# Altium PCB P-S 0-30V 3A Line.PcbDoc
Units mm, origin at the board's own origin, x right, y up, seen from the top; angles counter-clockwise.
Board outline 200 x 100 mm, 2 copper layers (Top Layer, Bottom Layer); 33 components, 16 nets, 76 pads, 0 vias.
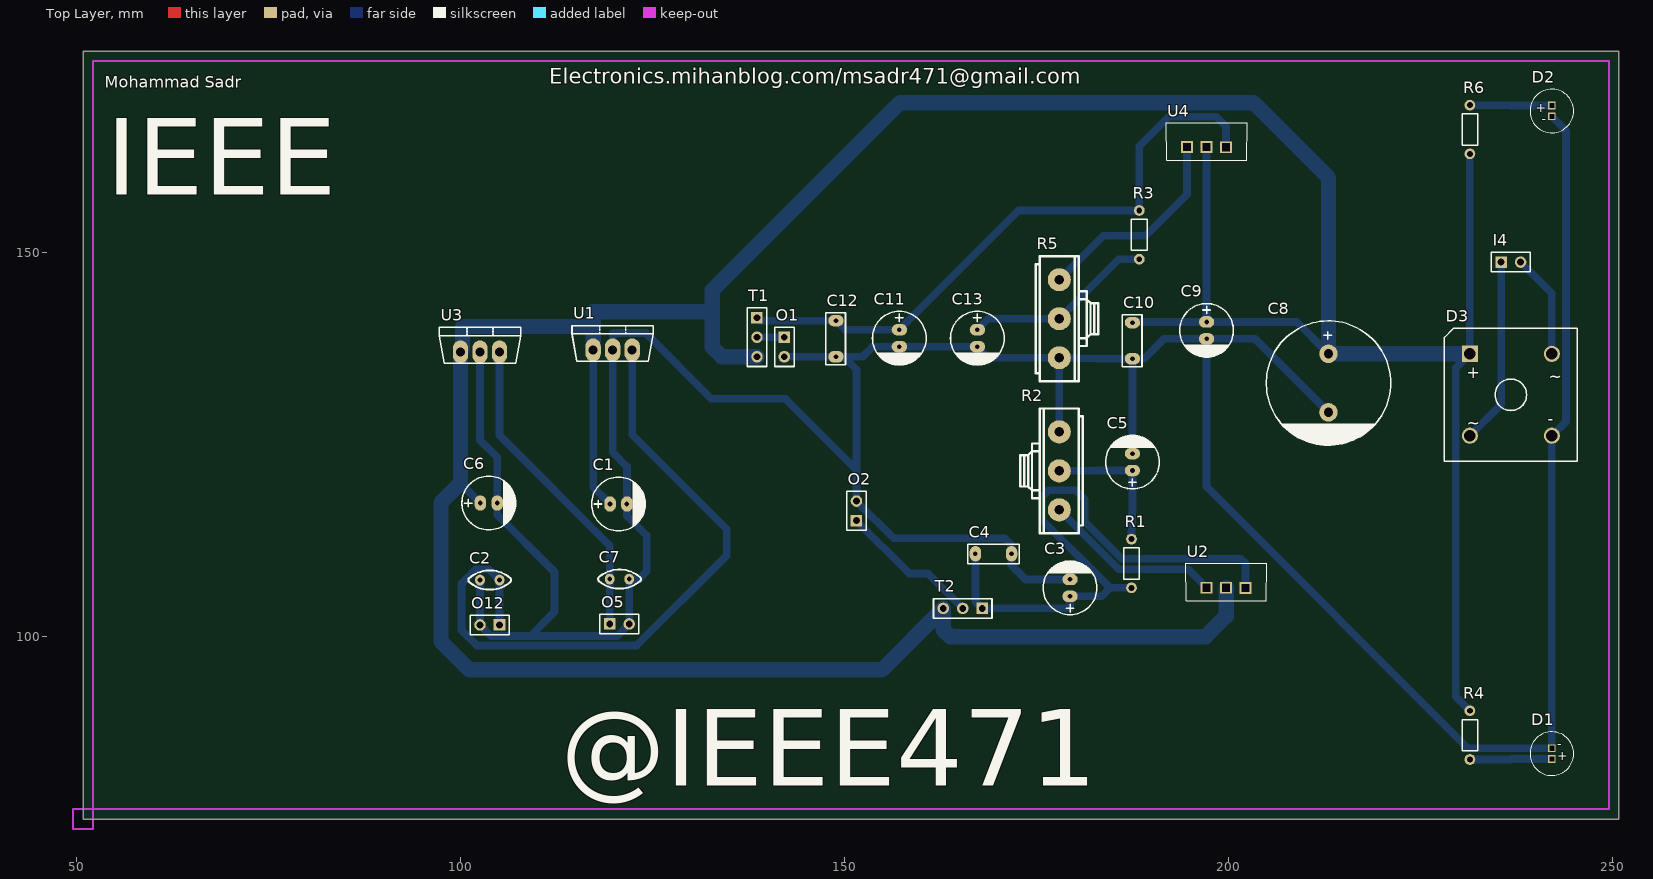
[diagram p0: Top Layer view]
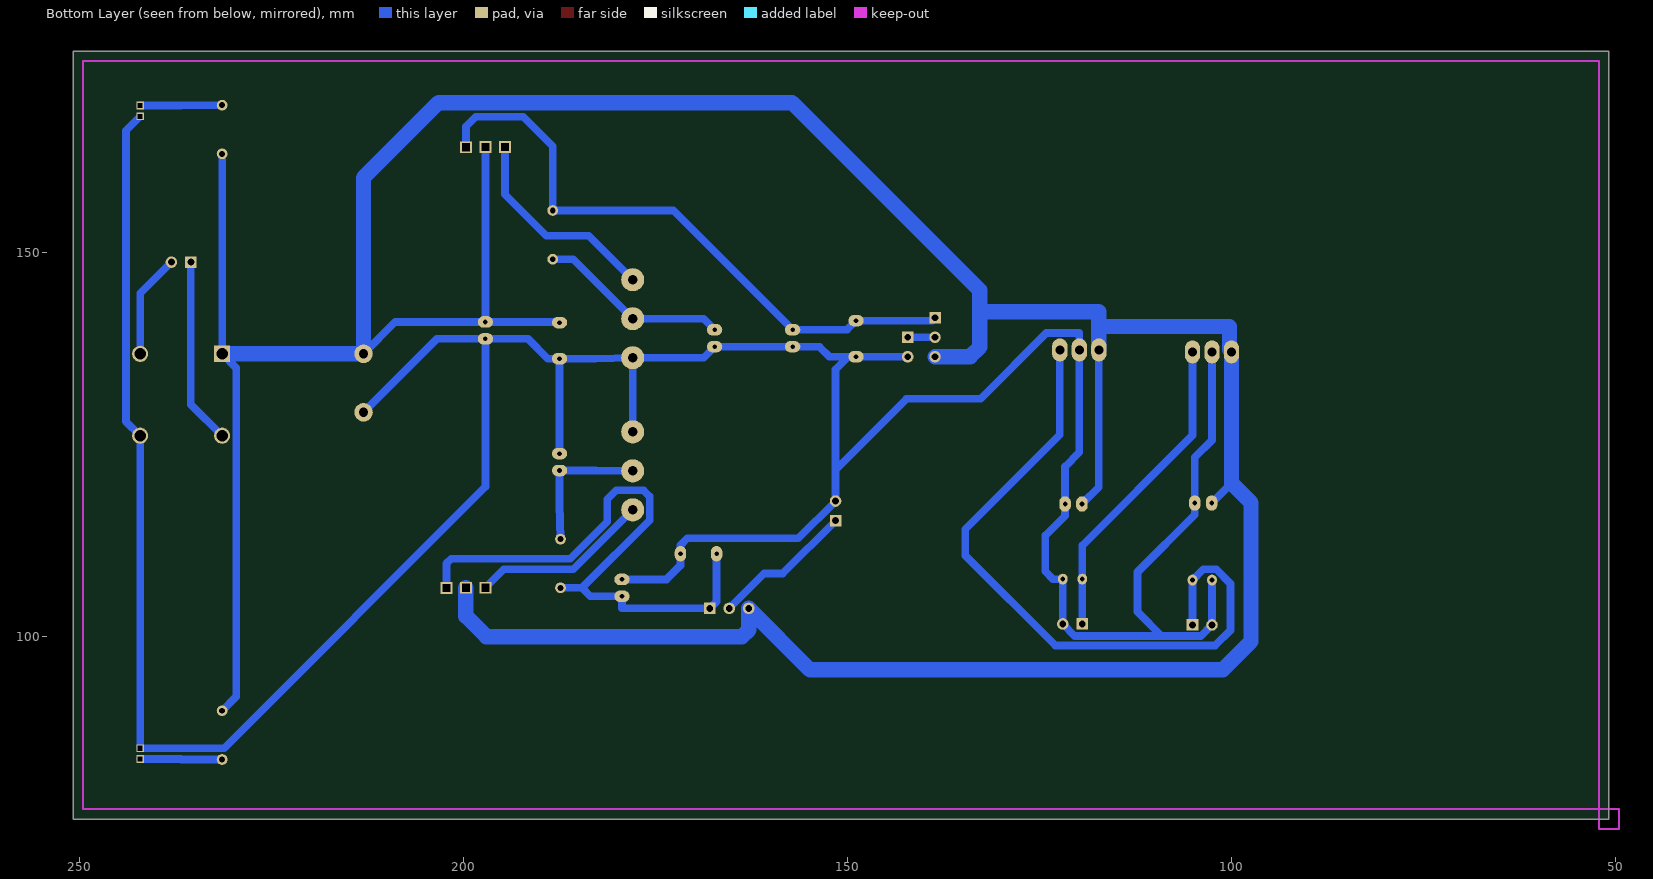
[diagram p1: Bottom Layer view, seen from below]

## Layer stack, top to bottom
Top Solder: solder mask 0.0102, Solder Resist, Dk 3.5
Top Layer: signal copper 0.0356
Dielectric 1: dielectric 0.32, FR-4, Dk 4.8
Bottom Layer: signal copper 0.0356
Bottom Solder: solder mask 0.0102, Solder Resist, Dk 3.5

## Board outline
50.8,76.2 250.8,76.2 250.8,176.2 50.8,176.2

## Design rules (kind name [scope] priority, off if disabled: settings)
Clearance [All] p1: gap=0.2
PolygonConnect [All] p1: connectstyle=Relief reliefconductorwidth=0.254 reliefentries=4 polygonreliefangle="90 Angle" airgapwidth=0.254
RoomDefinition "P-S 0-30V 3A Line" [InComponentClass('P-S 0-30V 3A Line')] p1: confinementstyle=ConfineIn formatcopy=TRUE lockcomponents=FALSE outline 52.1,77.5 249.5,77.5 249.5,174.9 52.1,174.9
RoutingVias [All] p1: holewidth=0.6 width=1 viastyle="Through Hole" minholewidth=0.711 minwidth=1.27 maxholewidth=0.711 maxwidth=1.27
SolderMaskExpansion [All] p1: expansion=0.102
Width [All] p1: maxlimit=1 minlimit=1 preferedwidth=1 minimp=50.000000 maximp=50.000000 favimp=50.000000
30 further rules are at their usual default settings.

## Components (designator, comment, footprint, x,y, rotation, side; value= is the part's Value field where it differs from the comment)
C1 "1uF" "cap 02" 120.523,117.221 r180 top
C2 "100nF" "Cap - 100nF" 103.759,107.315 r180 top
C3 "1uF" "cap 02" 179.324,106.299 r270 top
C4 "100nF" "Cap - 100nF - 2" 167.005,110.744 r0 top
C5 "1uF" "cap 02" 187.452,122.682 r270 top
C6 "1uF" "cap 02" 103.632,117.348 r180 top
C7 "100nF" "Cap - 100nF" 120.65,107.442 r0 top
C8 "1uF" "CAP 05" 212.979,132.969 r90 top
C9 "1uF" "cap 02" 197.104,139.827 r90 top
C10 "100nF" "Cap - 100nF - 2" 187.452,140.843 r270 top
C11 "1uF" "cap 02" 157.099,138.811 r90 top
C12 "100nF" "Cap - 100nF - 2" 148.844,141.097 r270 top
C13 "1uF" "cap 02" 167.259,138.811 r90 top
D1 "LED" "Blue LED 5mm" 242.062,84.709 r0 top
D2 "LED" "Blue LED 5mm" 242.062,168.402 r180 top
D3 "Bridge2" D-46_6A 236.728,131.445 r0 top
I4 "Header 2" HDR1X2 235.458,148.717 r0 top
O1 "Header 2" HDR1X2 142.113,138.938 r270 top
O2 "Header 2" HDR1X2 151.511,115.062 r90 top
O5 "Header 2" HDR1X2 119.38,101.6 r0 top
O12 "Header 2" HDR1X2 105.029,101.473 r180 top
R1 "1K" Res-(1/4) 187.325,109.474 r270 top
R2 "POT" VOL_1 177.927,116.459 r90 top
R3 "1K" Res-(1/4) 188.341,152.273 r90 top
R4 "1K" Res-(1/4) 231.394,87.122 r90 top
R5 "POT" VOL_1 177.927,146.431 r270 top
R6 "1K" Res-(1/4) 231.394,165.989 r270 top
T1 "2N3055" HDR1X3 138.557,141.478 r270 top
T2 "2N3055" HDR1X3 167.894,103.632 r180 top
U1 "MC7812T" TO220V 119.761,137.287 r0 top
U2 "Volt Reg" TO220 199.644,106.299 r0 top
U3 "MC7805T" TO220V 102.489,137.033 r0 top
U4 "Volt Reg" TO220 197.104,163.703 r0 top

## Footprints (in the part's own frame and the unit in brackets; to place one, negate y for a bottom-side part, rotate by r counter-clockwise, add the part's x,y. Pads: shape width x height; smd on the part's side, far side on the other; paste and mask are expansions set on the pad)
"Blue LED 5mm" [mm] "Blue LED 5mm"
  rect 1x1 hole 0.6 square: 1(0,-0.703) 2(0,0.703)
  silkscreen extent -2.84,-2.84 2.84,2.84, body extent -2.9,-2.9 2.9,2.9, height 13.5
"cap 02" [mm]
  oval 1.5x2 hole 0.6: 1(1.1,0) 2(-1.1,0)
  silkscreen extent -3.5,-3.5 3.5,3.5
"CAP 05" [mil]
  round 95 hole 48: 1(150,0) 2(-150,0)
  silkscreen extent -319,-319 319,319, body extent -320,-320 320,320, height 651
"Cap - 100nF" [mil]
  oval 50x55 hole 25: 1(-50,0) 2(50,0)
  silkscreen extent -110,-49 110,49, body extent -115,-34 115,33, height 272
"Cap - 100nF - 2" [mm]
  oval 1.5x2 hole 0.6: 1(0,0) 2(4.7,0)
  silkscreen extent -1.02,-1.33 5.72,1.24, body extent -0.75,-1.2 5.55,1.2, height 6.84
D-46_6A [mm] "Bridge Rectifier; 4 Terminals; Body 16.8 x 16.8 mm (typ); Pitch 10.67 mm"
  rect 2.1x2.1 hole 1.5: 1(-5.335,5.335)
  round 2.1 hole 1.5: 2(-5.335,-5.335) 3(5.335,-5.335) 4(5.335,5.335)
  silkscreen extent -8.65,-8.65 8.65,8.65, body extent -8.65,-8.65 8.65,8.65, height 6.35
HDR1X2 [mm] "Connector; Header; 2 Position"
  rect 1.5x1.5 hole 0.9: 1(0,0)
  round 1.5 hole 0.9: 2(2.54,0)
  silkscreen extent -1.27,-1.27 3.81,1.27
HDR1X3 [mm] "Connector; Header; 3 Position"
  rect 1.5x1.5 hole 0.9: 1(0,0)
  round 1.5 hole 0.9: 2(2.54,0) 3(5.08,0)
  silkscreen extent -1.27,-1.27 6.35,1.27
Res-(1/4) [mil]
  round 55 hole 30: 1(-125,0) 2(125,0)
  silkscreen extent -80,-40 80,40, body extent -135,-36 135,36, height 115
TO220 [mil] "TO220"
  rect 60x60 hole 40 square: 1(-100,0) 2(0,0) 3(100,-1)
  silkscreen extent -210,-67 209,125, body extent -210,-65 210,125, height 890
TO220V [mm]
  oval 2x3 hole 1.2: 1(-2.54,0) 2(0,0) 3(2.54,0)
  silkscreen extent -5.29,-1.48 5.29,3.17
VOL_1 [mm]
  round 3 hole 1.2: 1(0,0) 2(5.08,0) 3(10.16,0)
  silkscreen extent -3.05,-3.05 13.21,5.08

## Part data
C1 C3 C5 C6 C8 C9 C11 C13: library part Cap-Polar, "Polar Capacitor"
C2 C4 C7 C10 C12: library part Cap-Bipolar, "Bipolar Capacitor"
D1 D2: library part "LED Full color"
D3: "Diode Bridge"
I4 O1 O2 O5 O12: "Header, 2-Pin"
R1 R3 R4 R6: library part Resistor, "Resistor"
T1 T2: library part "Header 3", "Header, 3-Pin"
U2 U4: library part "Volt reg 3", "LM337"

## Nets (pads, with @x,y where several pads share a name; then routed paths per layer and width w, separated by ;. In a path a pad name is that pad's centre, name@x,y a point inside that pad or via, vN(x,y) a via of type N, cw(c..) or ccw(c..) an arc to the next point about the centre after c; other vN are vias at no path point)
GND: C1.2 C2.2 C3.2 C4.2 C5.2 C6.2 C7.2 C8.2 C9.2 C10.2 C11.2 C12.2 C13.2 D1.2 D2.2 D3.3 O1.2 O2.2 O5.2 O12.2 R2.3 R5.3 U1.2 U3.2 | length 463.7
  Bottom Layer w1: C2.2 O12.2 103.939,100.023 109.015,100.023 ; U3.2 102.489,125.527 104.732,123.284 C6.2 104.732,115.824 112.192,108.364 112.192,103.2 109.015,100.023 ; O1.2 145.466,136.398 145.467,136.397 C12.2 149.86,136.397 ; R2.3 R5.3 ; C3.2 173.526,107.399 171.705,109.22 C4.2 171.705,111.861 170.815,112.751 156.362,112.751 O2.2 151.511,121.691 ; C5.2 C10.2 ; C8.2 203.411,138.727 C9.2 ; D2.2 243.916,165.845 243.916,127.963 D3.3 242.063,105.741 242.062,105.74 D1.2 231.14,85.412 197.104,119.448 C9.2 ; 109.015,100.023 120.343,100.023 O5.2 C7.2 123.19,107.442 124.206,108.458 124.206,113.114 121.623,115.697 C1.2 121.623,122.098 119.761,123.96 U1.2 119.761,139.487 124.079,139.487 132.629,130.937 142.265,130.937 151.511,121.691 ; 149.86,136.397 151.511,134.746 151.511,121.691 ; 149.86,136.397 152.298,136.397 153.612,137.711 C11.2 C13.2 168.699,136.271 R5.3 ; R5.3 182.805,136.143 C10.2 ; C10.2 188.976,136.143 191.56,138.727 C9.2
NetC1_1: C1.1 C6.1 C8.1 C9.1 C10.1 D3.1 R4.2 R6.2 T1.3 T2.3 U1.1 U2.2 U3.1 U4.2 | length 492.9
  Bottom Layer w1: 99.949,119.931 C6.1 ; U3.1 U3.1@100.203,137.287 ; U1.1 117.221,119.423 C1.1 ; C10.1 187.536,140.927 C9.1 ; U4.2 C9.1 ; C8.1 208.831,140.927 C9.1 ; R4.2 229.54,92.151 229.54,134.927 D3.1 231.393,149.784 231.394,149.785 R6.2
  Bottom Layer w2: U3.1 99.949,119.931 97.409,117.391 97.409,99.314 101.092,95.631 154.813,95.631 T2.3 162.814,100.838 163.703,99.949 193.294,99.949 196.977,99.949 199.644,102.616 U2.2 ; U3.1@100.203,137.287 100.203,140.335 117.221,140.335 ; U1.1 117.221,140.335 ; T1.3 133.985,136.398 132.715,137.668 132.715,142.24 ; C8.1 212.979,159.715 203.2,169.494 157.175,169.494 132.715,145.034 132.715,142.24 ; C8.1 D3.1 ; 117.221,140.335 117.221,142.24 132.715,142.24
NetC2_1: C2.1 O12.1 U1.3 | length 90.3
  Bottom Layer w1: O12.1 C2.1 103.63,108.714 101.936,108.714 100.076,106.853 100.076,100.779 102.049,98.806 122.911,98.806 134.62,110.515 134.62,113.944 122.301,126.263 U1.3
NetC3_1: C3.1 C4.1 R1.2 T2.1 U2.3 | length 80.1
  Bottom Layer w1: C4.1 167.005,104.521 T2.1 179.324,103.632 C3.1 183.431,105.199 184.531,106.299 ; R1.2 184.531,106.299 ; U2.3 202.184,109.474 201.549,110.109 186.055,110.109 181.229,114.935 181.229,117.856 180.086,118.999 176.53,118.999 175.717,118.186 175.717,115.113 184.531,106.299
NetC5_1: C5.1 R1.1 R2.2 | length 18.5
  Bottom Layer w1: R2.2 182.72,121.582 C5.1 187.452,117.221 R1.1
NetC7_1: C7.1 O5.1 U3.3 | length 41.4
  Bottom Layer w1: U3.3 105.029,126.162 119.38,111.811 C7.1 O5.1
NetC11_1: C11.1 C12.1 R3.2 T1.1 U4.3 | length 81.3
  Bottom Layer w1: T1.1 138.938,141.097 C12.1 150.03,139.911 C11.1 172.636,155.448 R3.2 188.341,163.805 192.176,167.64 198.374,167.64 199.644,166.37 U4.3
NetC13_1: C13.1 R3.1 R5.2 | length 24.9
  Bottom Layer w1: C13.1 168.699,141.351 R5.2 185.674,149.098 R3.1
NetD1_1: D1.1 R4.1 | length 10.7
  Bottom Layer w1: R4.1 236.728,83.947 236.787,84.006 D1.1
NetD2_1: D2.1 R6.1 | length 10.7
  Bottom Layer w1: R6.1 236.728,169.164 236.787,169.105 D2.1
NetD3_2: D3.2 I4.1 | length 24.3
  Bottom Layer w1: D3.2 235.458,130.175 I4.1
NetD3_4: D3.4 I4.2 | length 13.6
  Bottom Layer w1: I4.2 242.063,144.652 D3.4
NetO1_1: O1.1 T1.2 | length 3.6
  Bottom Layer w1: T1.2 O1.1
NetO2_1: O2.1 T2.2 | length 18.6
  Bottom Layer w1: O2.1 158.394,108.179 160.807,108.179 T2.2
NetR2_1: R2.1 U2.1 | length 23.4
  Bottom Layer w1: R2.1 185.674,108.712 194.691,108.712 U2.1
NetR5_1: R5.1 U4.1 | length 27.4
  Bottom Layer w1: R5.1 183.667,152.171 189.179,152.171 194.564,157.556 U4.1

## Keep-outs
Keep-Out Layer:
  lines w0.3: 52.1,77.5 49.5,77.5 49.5,74.9 52.1,74.9 52.1,77.5 ; 52.1,77.5 52.1,174.9 249.5,174.9 249.5,77.5 52.1,77.5

## Silkscreen, mask and mechanical layers (free items; w line width, h text height)
Top Overlay:
  text "Electronics.mihanblog.com/msadr471@gmail.com" at 111.506,171.958 h2
  text "Mohammad Sadr" at 53.594,171.45 h1.52
  text "IEEE" at 53.848,157.48 h10
  text "@IEEE471" at 113.03,80.518 h10
Drill Drawing:
  text ".LEGEND" at 56.49,81.407 h1.52
  text "Drill Drawing." at 56.49,78.867 h1.52

## Dimensions
50.8,76.2 to 52.1,77.5 on Mechanical 1
50.8,76.2 to 52.1,77.5 on Mechanical 1

## Text inside footprints (layer, text, board x,y; h text height)
D1: Top Overlay "-" at 242.772,85.029 h2; Top Overlay "+" at 242.762,83.429 h2
D2: Top Overlay "-" at 241.352,168.082 h2 r180; Top Overlay "+" at 241.362,169.682 h2 r180
D3: Top Overlay "~" at 231.005,127.008 h1.5; Top Overlay "~" at 241.673,133.104 h1.5; Top Overlay "-" at 241.553,127.636 h1.5; Top Overlay "+" at 231.005,133.612 h1.5